# Altium PCB serial-con.PcbDoc
Units mm, origin at the board's own origin, x right, y up, seen from the top; angles counter-clockwise.
Board outline 29.34 x 31.37 mm, 2 copper layers (Top Layer, Bottom Layer); 10 components, 14 nets, 43 pads, 4 vias.
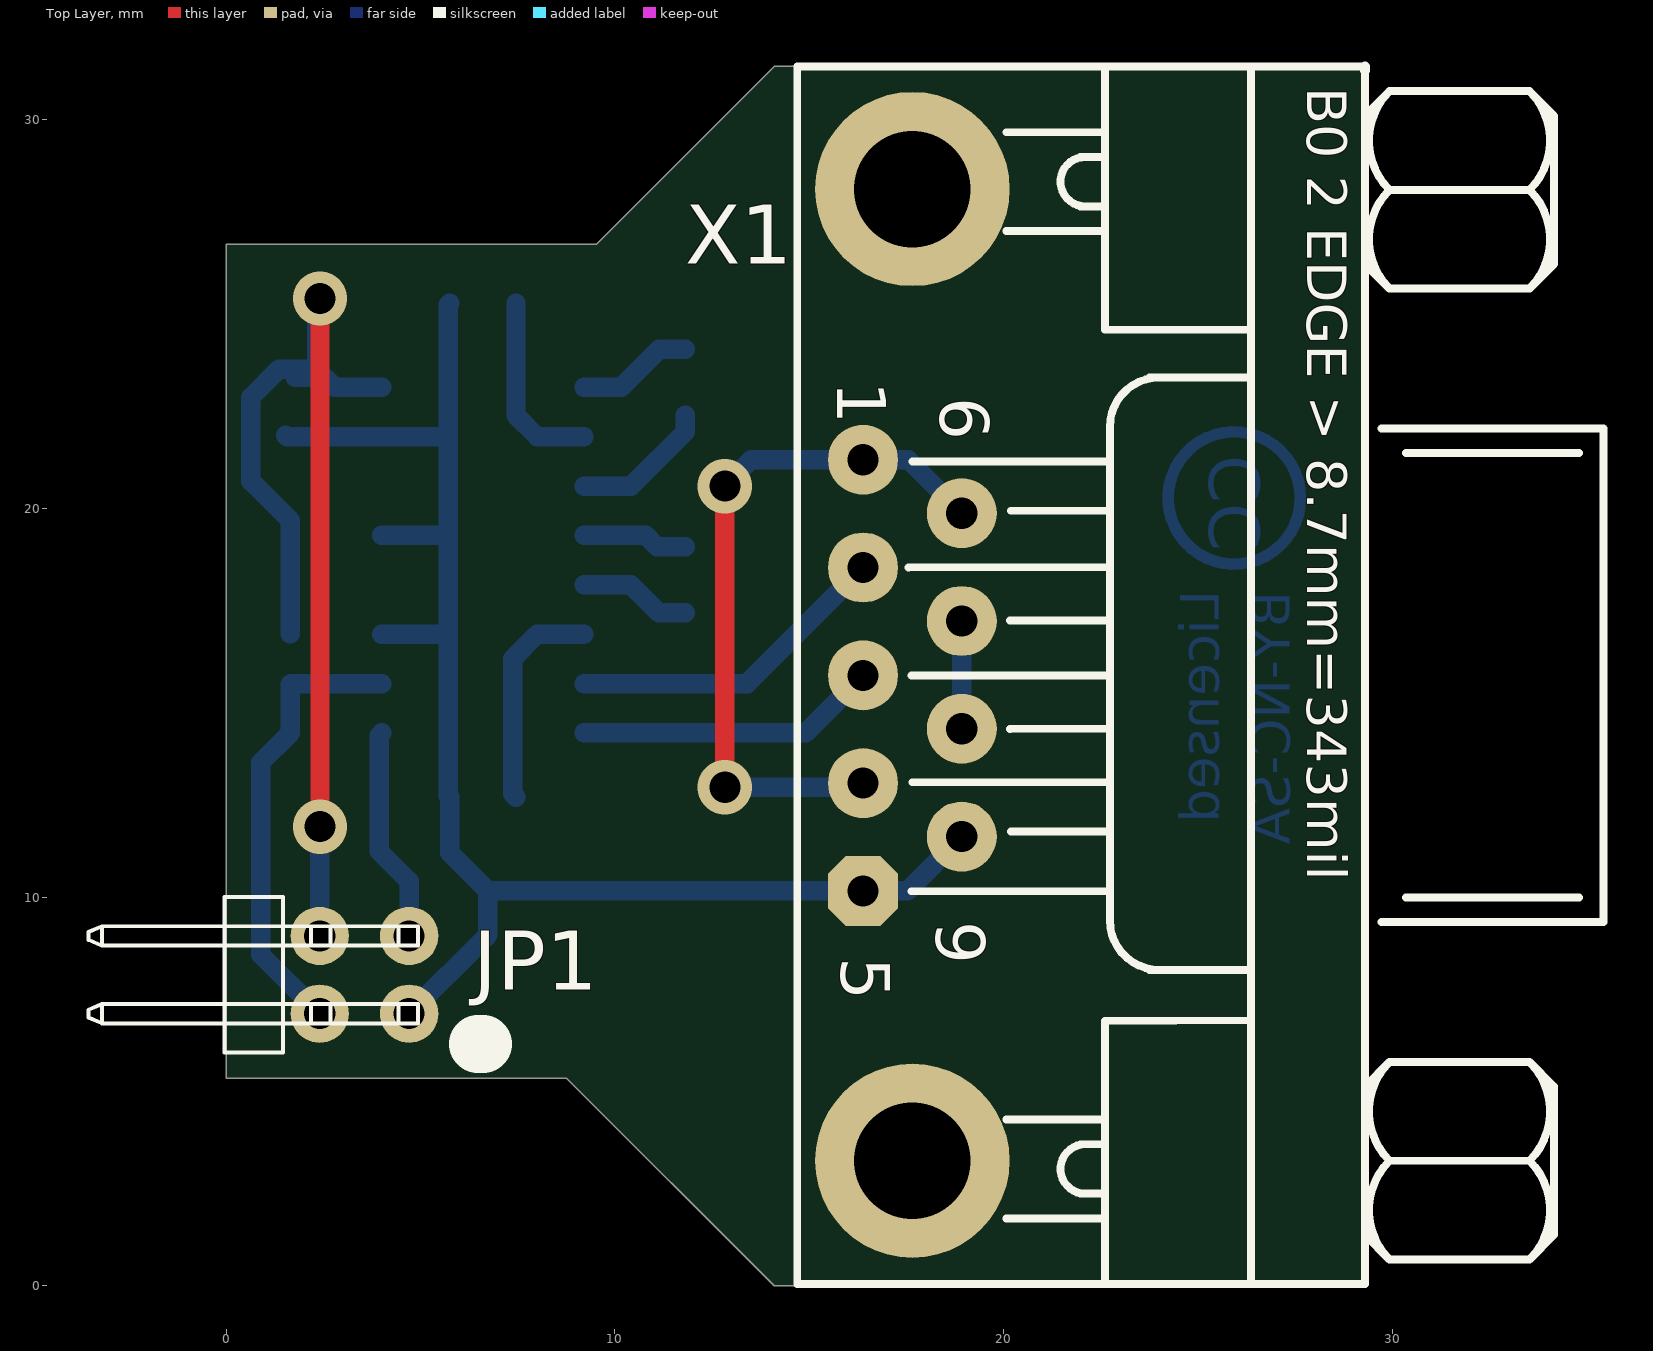
[diagram p0: Top Layer view]
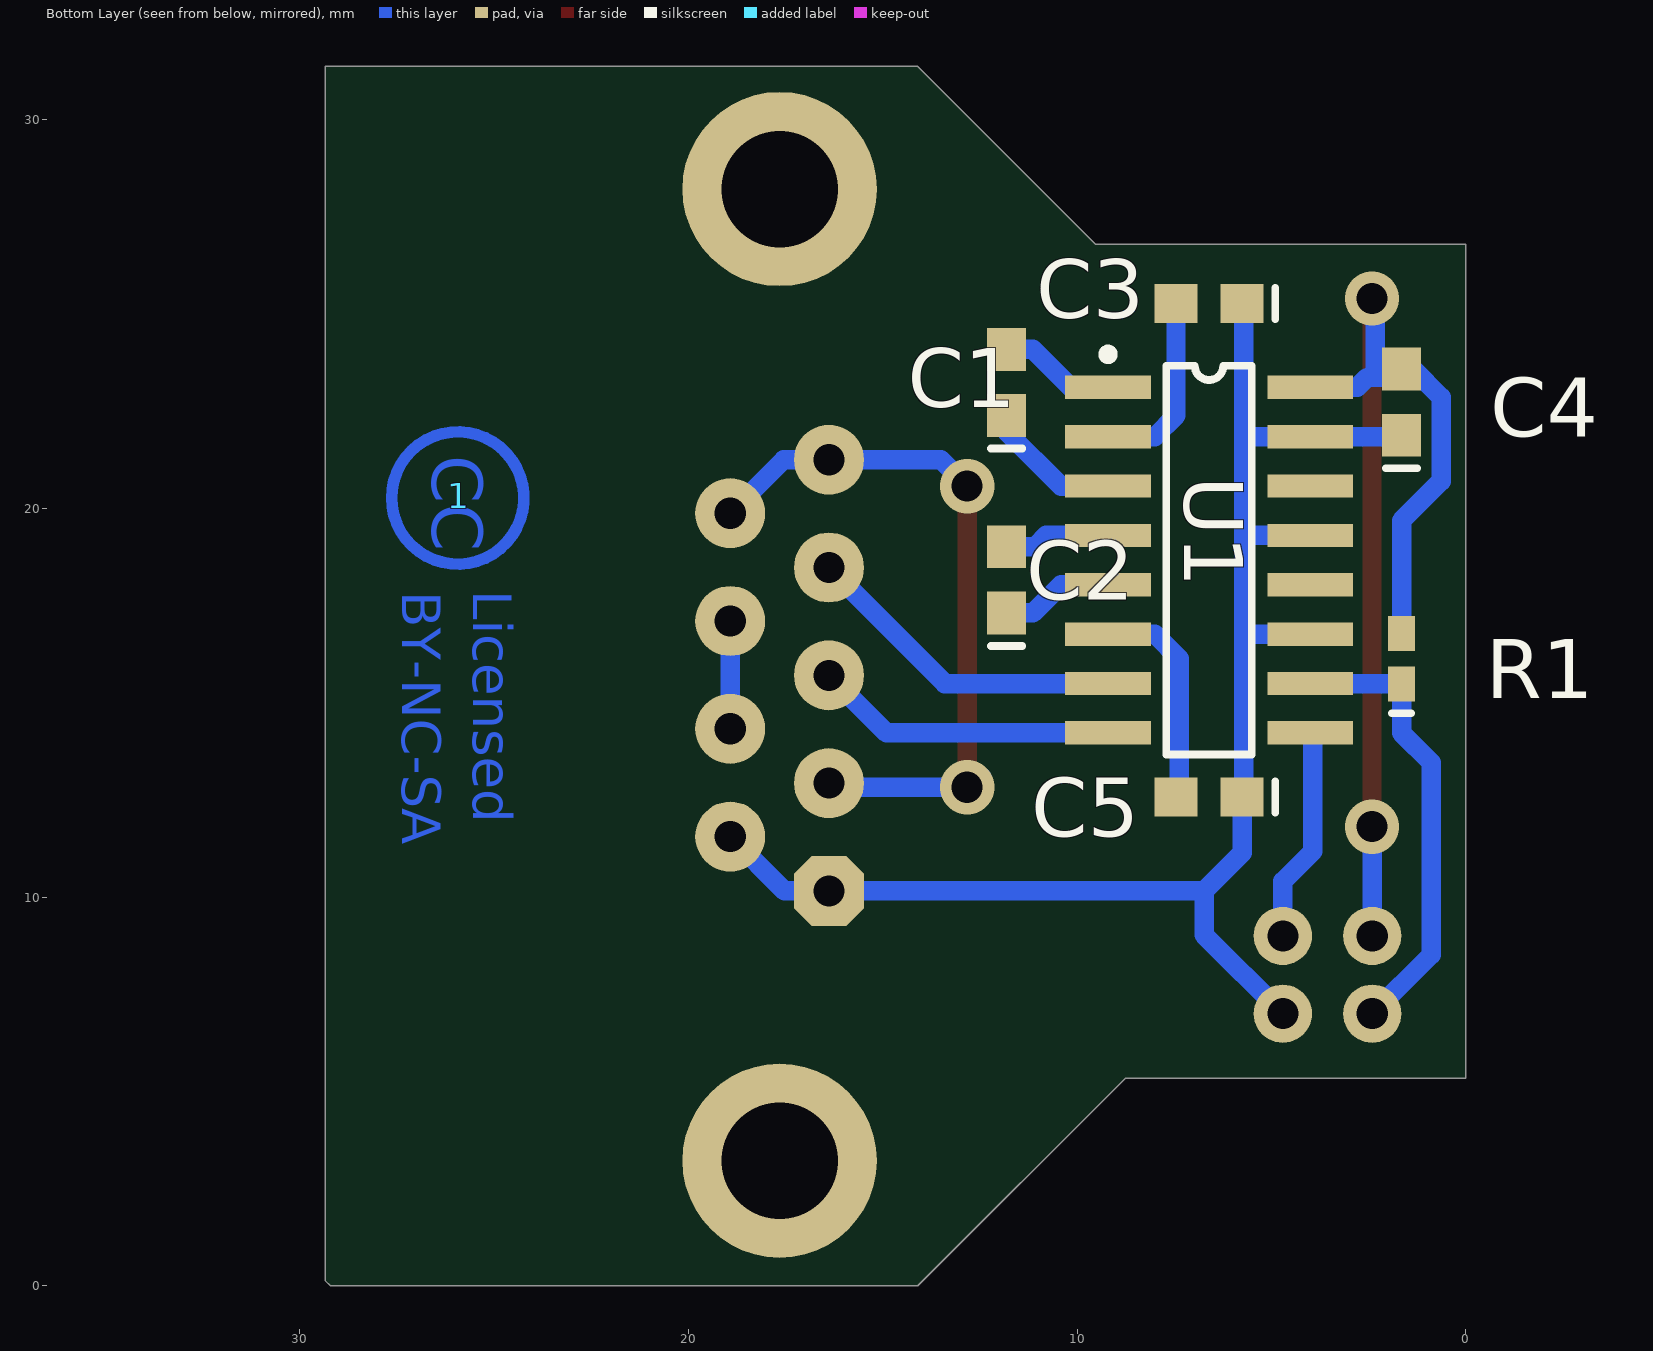
[diagram p1: Bottom Layer view, seen from below]

## Layer stack, top to bottom
Top Layer: signal copper 0.0356
Dielectric: dielectric 0.32, FR-4, Dk 4.8
Bottom Layer: signal copper 0.0356

## Board outline
0,5.334 8.763,5.334 14.097,0 29.21,0 29.337,0.127 29.337,31.369 14.097,31.369 9.525,26.797 0,26.797

## Design rules (kind name [scope] priority, off if disabled: settings)
Clearance [All] p1: gap=0.254
ComponentClearance [All] p1: gap=0.254 collisioncheckmode=3 verticalgap=0.254
HoleSize [All] p1: absolutevalues=TRUE maxlimit=10 minlimit=0.5 maxpercent=80.000 minpercent=20.000
PolygonConnect [All] p1: connectstyle=Relief reliefconductorwidth=0.254 reliefentries=4 polygonreliefangle="90 Angle"
RoomDefinition serial-con [InComponentClass('serial-con')] p1: confinementstyle=ConfineIn formatcopy=TRUE lockcomponents=FALSE outline -3.81,-0.381 35.814,-0.381 35.814,31.877 -3.81,31.877
RoutingVias [All] p1: holewidth=0.8 width=1.4 viastyle="Through Hole" minholewidth=0.5 minwidth=1.27 maxholewidth=2 maxwidth=10
SolderMaskExpansion [All] p1: expansion=0.102
TestPointUsage [All] p1: valid=0 allowmultiple=FALSE
Testpoint [All] p1: side=15 testpointundercomponent=TRUE minsize=1.016 maxsize=2.54 preferedsize=1.524 minholesize=0 maxholesize=1.016 preferedholesize=0.813 testpointgrid=0.025 style=1023 order=0123456789
Width [All] p1: maxlimit=10 minlimit=0.3 preferedwidth=0.5
17 further rules are at their usual default settings.

## Components (designator, comment, footprint, x,y, rotation, side; value= is the part's Value field where it differs from the comment)
1 "CC License" CC-License 25.908,20.32 r270 bottom
C1 "Cap" 0603 11.811,23.241 r90 bottom
C2 "Cap" 0603 11.811,18.161 r90 bottom
C3 "Cap" 0603 6.604,25.273 r0 bottom
C4 "Cap" 0603 1.651,22.733 r90 bottom
C5 "Cap" 0603 6.604,12.573 r0 bottom
JP1 "M22-2040205" M22-2040205 3.556,8.001 r90 top
R1 "Res2" 0402 1.651,16.129 r90 bottom
U1 "MAX3232CSE" SO-G16 6.604,18.669 r270 bottom
X1 "DB9/F" DSUB9RA/F 16.383,10.16 r270 top

## Footprints (in the part's own frame and the unit in brackets; to place one, negate y for a bottom-side part, rotate by r counter-clockwise, add the part's x,y. Pads: shape width x height; smd on the part's side, far side on the other; paste and mask are expansions set on the pad)
0402 [mm] "Chip Capacitor; Body 1.0 x 0.5 mm (LxW typ)"
  rect 0.9x0.7 smd: 1(-0.65,0) 2(0.65,0)
  silkscreen extent -1.4,-0.25 -1.4,0.25
0603 [mm] "Chip Capacitor; Body 1.6 x 0.8 mm (LxW typ)"
  rect 1.1x1 smd: 1(-0.85,0) 2(0.85,0)
  silkscreen extent -1.7,-0.4 -1.7,0.4
CC-License [mm]
  Top Layer circle w0.3: c0.052,-0.025 r1.702
DSUB9RA/F [mm] "DB9 female connector"
  round 1.8 hole 0.8: 1(-11.091,0) 2(-8.318,0) 3(-5.546,0) 4(-2.773,0) 6(-9.715,2.54) 7(-6.943,2.54) 8(-4.17,2.54) 9(-1.397,2.54)
  oct 1.8x1.8 hole 0.8: 5(0,0)
  round 5 hole 3: ""(-18.055,1.27) ""(6.943,1.27)
  silkscreen extent -21.21,-1.69 10.12,19.05
M22-2040205 [mm] "Harwin 2mm horizontal connector 2x2 pin"
  round 1.5 hole 0.8: 1(-1,-1.15) 2(-1,1.15) 3(1,-1.15) 4(1,1.15)
  silkscreen extent -2,-1.38 2,7.1
SO-G16 [mm] "Small Outline; 16 Leads; Body Width 3.9 mm; Pitch 1.27 mm"
  rect 0.6x2.2 smd: 1(-4.445,-2.6) 2(-3.175,-2.6) 3(-1.905,-2.6) 4(-0.635,-2.6) 5(0.635,-2.6) 6(1.905,-2.6) 7(3.175,-2.6) 8(4.445,-2.6) 9(4.445,2.6) 10(3.175,2.6) 11(1.905,2.6) 12(0.635,2.6) 13(-0.635,2.6) 14(-1.905,2.6) 15(-3.175,2.6) 16(-4.445,2.6)
  silkscreen extent -5.42,-2.72 5,1.1

## Part data
C1 C2 C3 C4 C5: "Capacitor"
R1: "Resistor"
U1: "3.0V TO 5.5V, Low-Power, up to 1Mbps, True RS-232 Transceiver Using Four 0.1µF External Capacitor"

## Via types
v1: diameter 1.4, hole 0.8, Top Layer to Bottom Layer, 4 vias

## Nets (pads, with @x,y where several pads share a name; then routed paths per layer and width w, separated by ;. In a path a pad name is that pad's centre, name@x,y a point inside that pad or via, vN(x,y) a via of type N, cw(c..) or ccw(c..) an arc to the next point about the centre after c; other vN are vias at no path point)
3.3V: C4.2 JP1.4 R1.2 U1.16 | length 29.1
  Top Layer w0.5: v1(2.413,11.811) v1(2.413,25.4)
  Bottom Layer w0.5: R1.2 1.651,19.685 0.635,20.701 0.635,22.86 1.358,23.583 2.325,23.583 2.325,25.312 v1(2.413,25.4) ; C4.2@1.778,23.368 2.54,23.368 2.794,23.114 U1.16 ; JP1.4 2.406,11.804 v1(2.413,11.811)
GND: C3.1 C4.1 C5.1 JP1.1 U1.11 U1.13 U1.15 X1.5 X1.9 | length 39.9
  Bottom Layer w0.5: C4.1@1.524,21.883 1.563,21.844 5.715,21.844 ; U1.11 5.715,16.764 ; U1.13 5.715,19.304 ; JP1.1 6.731,9.026 6.731,10.16 ; C3.1 5.715,25.234 5.715,12.612 C5.1 5.754,11.137 6.731,10.16 ; X1.9 17.526,10.16 6.731,10.16
NetC1_1: C1.1 U1.3 | length 3.6
  Bottom Layer w0.5: U1.3 10.414,20.574 11.811,21.971 C1.1
NetC1_2: C1.2 U1.1 | length 3
  Bottom Layer w0.5: U1.1 10.16,23.114 11.137,24.091 C1.2
NetC2_1: C2.1 U1.5 | length 2.9
  Bottom Layer w0.5: U1.5 10.414,18.034 11.137,17.311 C2.1
NetC2_2: C2.2 U1.4 | length 2.7
  Bottom Layer w0.5: U1.4 10.795,19.304 11.049,19.05 ; 11.088,19.011 C2.2
NetC3_2: C3.2 U1.2 | length 4.9
  Bottom Layer w0.5: C3.2 7.454,22.391 8.001,21.844 U1.2
NetC5_2: C5.2 U1.6 | length 5.7
  Bottom Layer w0.5: C5.2 7.366,12.661 7.366,16.129 8.001,16.764 U1.6
NetU1_7: U1.7 X1.2 | length 8.4
  Bottom Layer w0.5: U1.7 13.399,15.494 X1.2
NetU1_8: U1.8 X1.3 | length 7.8
  Bottom Layer w0.5: U1.8 14.901,14.224 X1.3
NetX1_1: X1.1 X1.4 X1.6 | length 19.1
  Top Layer w0.5: v1(12.827,12.827) v1(12.827,20.574)
  Bottom Layer w0.5: v1@12.446,13.081 v1(12.827,12.827) 16.277,12.827 X1.4 X1.4@16.108,12.933 ; v1@12.785,20.574 v1(12.827,20.574) 13.504,21.251 17.547,21.251 X1.6
NetX1_7: X1.7 X1.8 | length 2.8
  Bottom Layer w0.5: X1.8@18.923,14.326 X1.7@18.923,17.094
"SERIAL IN": JP1.3 U1.9 | length 5.6
  Bottom Layer w0.5: U1.9 3.937,14.157 3.937,11.176 4.706,10.407 JP1.3
"SERIAL OUT": JP1.2 R1.1 U1.10 | length 11.8
  Bottom Layer w0.5: JP1.2 0.889,8.518 0.889,13.462 1.651,14.224 R1.1 1.666,15.494 U1.10
pads on no net: U1.12 U1.14 X1.

## Silkscreen, mask and mechanical layers (free items; w line width, h text height)
Top Overlay:
  lines w1.5: 6.477,6.223 6.604,6.223
Mechanical 1:
  the board outline again, w0.254

## Text inside footprints (layer, text, board x,y; h text height)
1: Bottom Layer "BY-NC-SA" at 27.358,17.87 h1 r90; Bottom Layer "Licensed" at 25.533,17.895 h1 r90; Bottom Layer "CC" at 26.583,21.37 h1.3 r90
X1: Top Overlay "6" at 18.364,22.86 h1.27 r270; Top Overlay "1" at 15.723,23.266 h1.27 r270; Top Overlay "5" at 15.824,8.458 h1.27 r270; Top Overlay "9" at 18.263,9.373 h1.27 r270; Top Overlay "B0 2 EDGE > 8.7mm=343mil" at 27.813,30.836 h1.02 r270